# Altium PCB PCB.pcbdoc
Units mil, origin at the board's own origin, x right, y up, seen from the top; angles counter-clockwise.
Board outline 3675 x 3422.74 mil, 2 copper layers (Top Layer, Bottom Layer); 32 components, 82 nets, 167 pads, 7 vias.
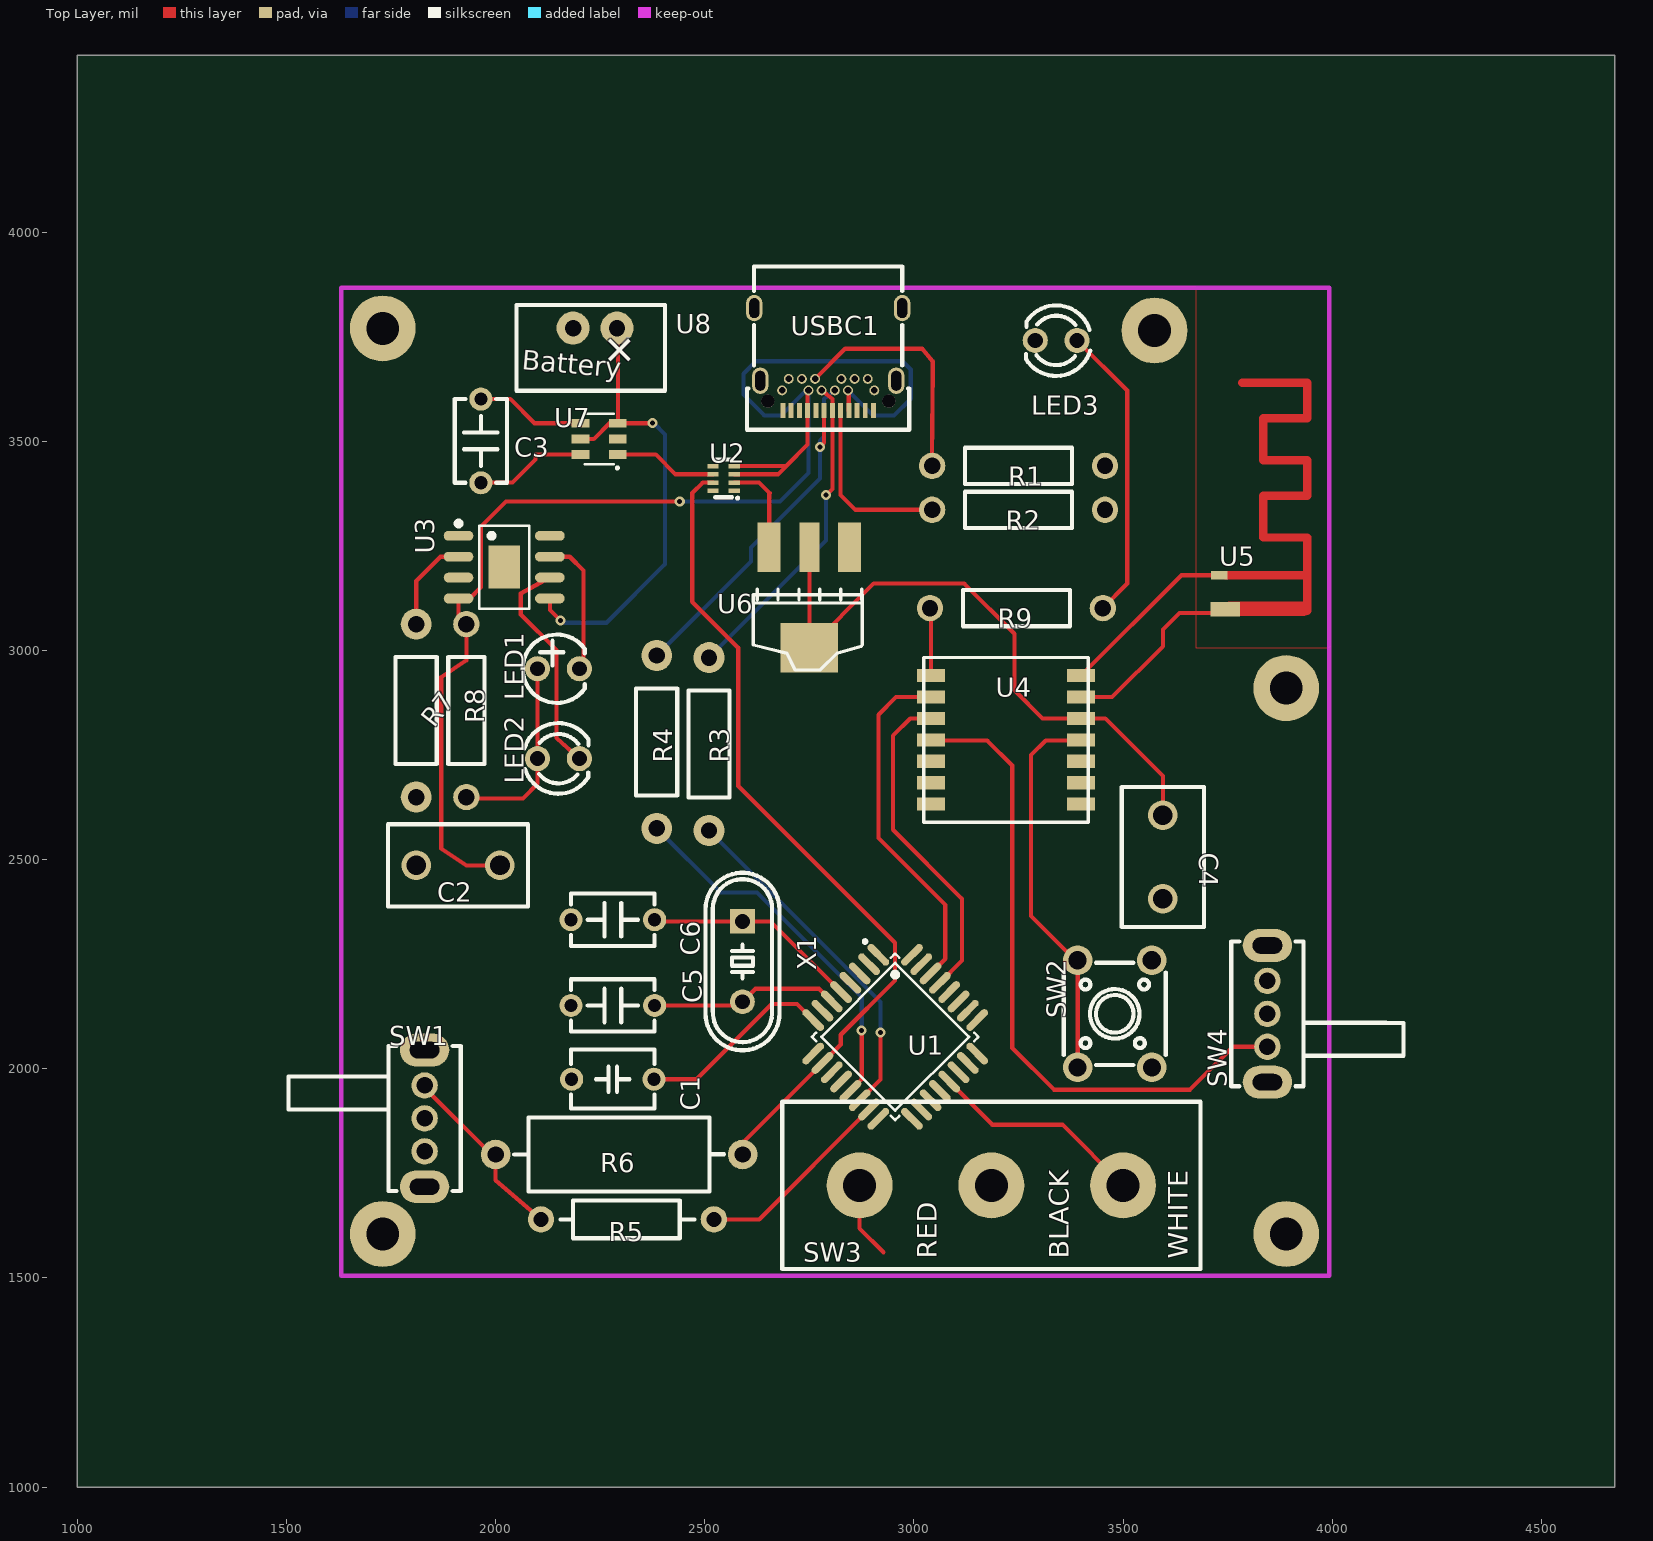
[diagram p0: Top Layer view]
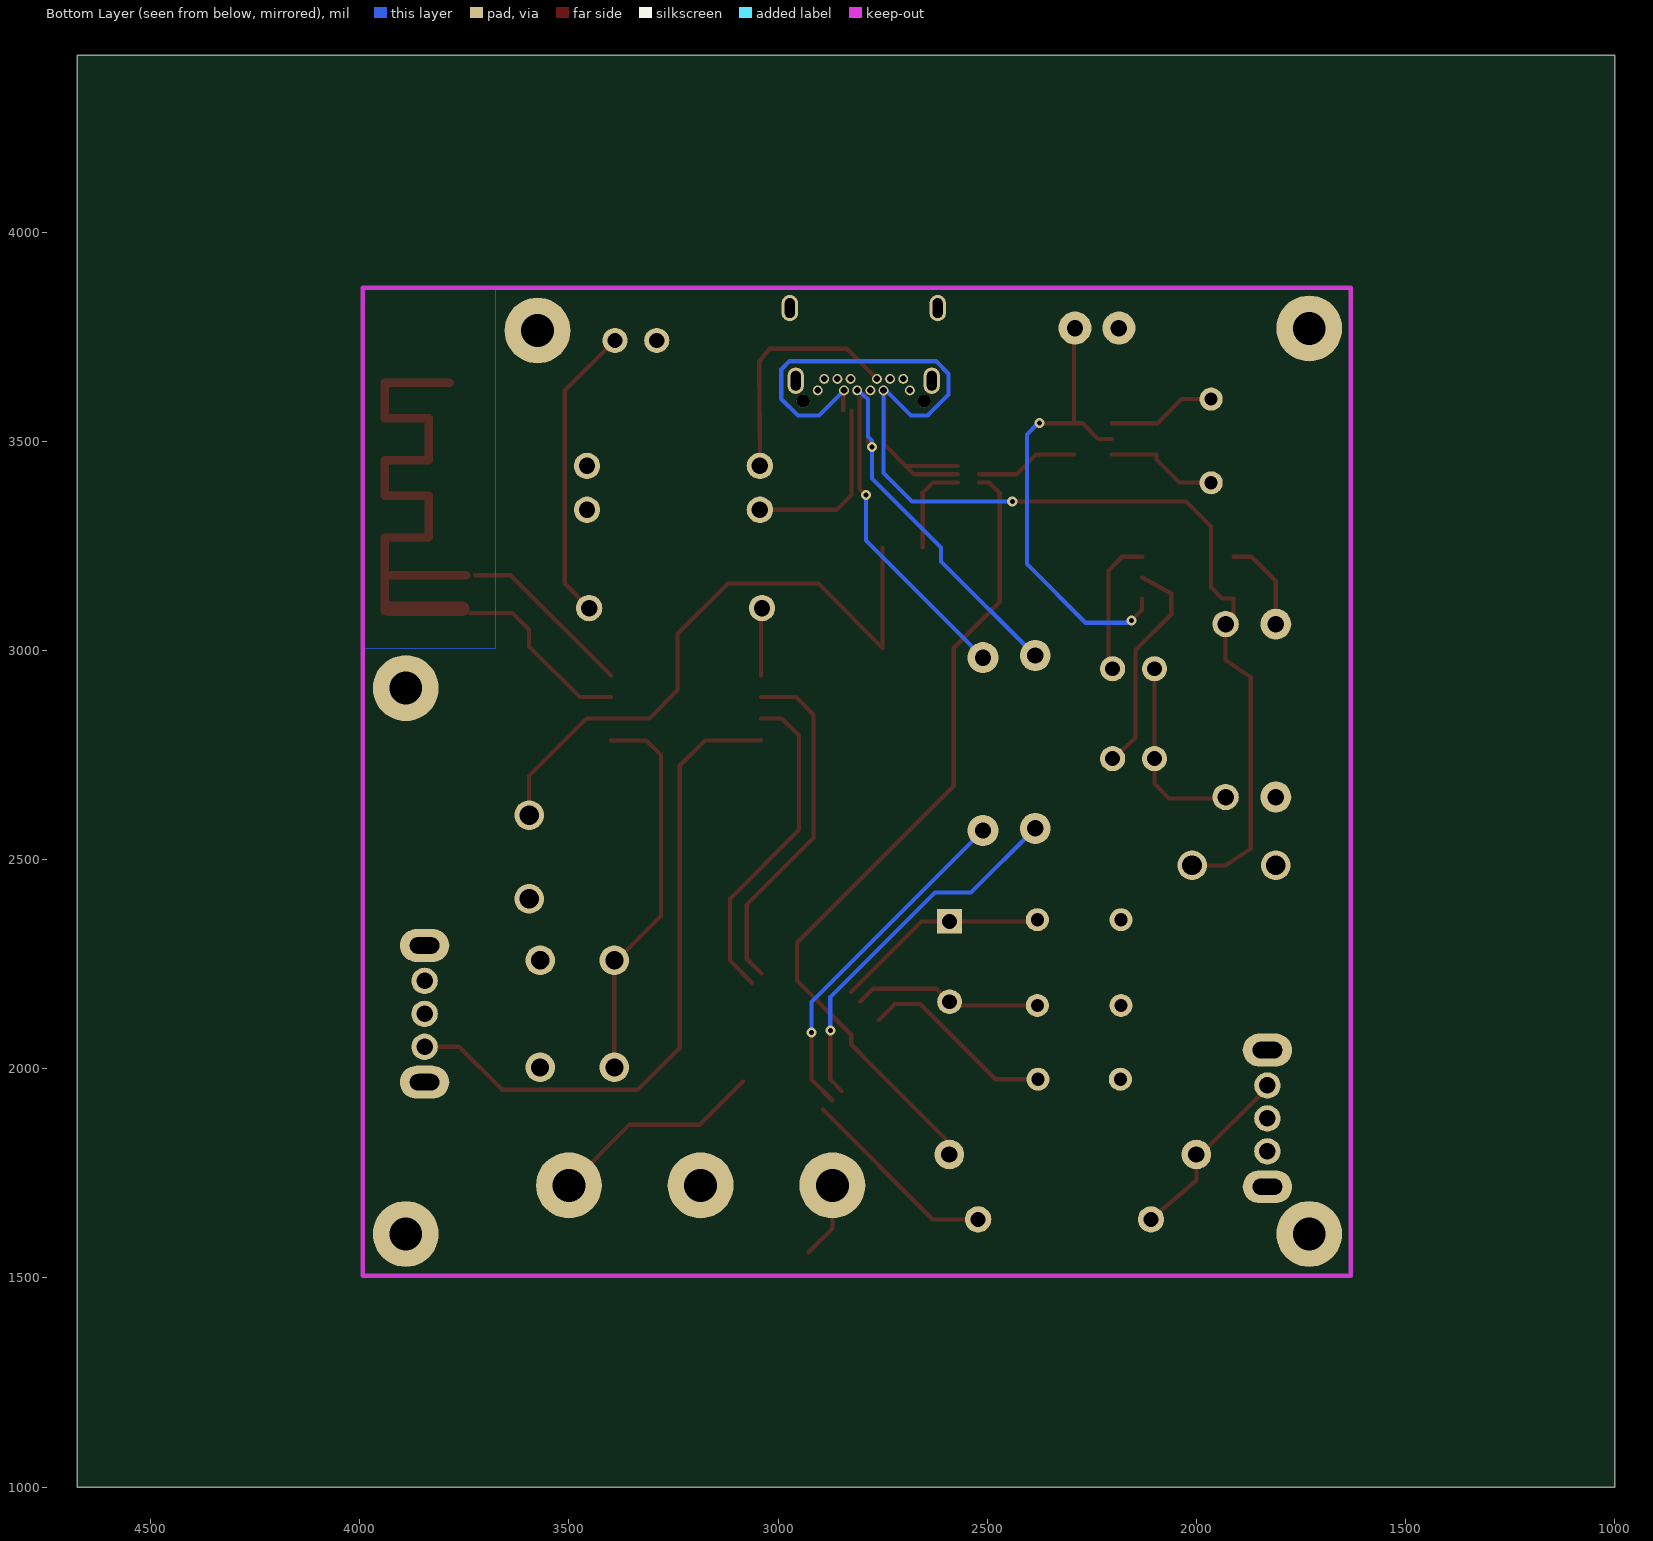
[diagram p1: Bottom Layer view, seen from below]

## Layer stack, top to bottom
Top Layer: signal copper (thickness not stored)
Dielectric: dielectric 12.6, FR-4, Dk 4.8
Bottom Layer: signal copper (thickness not stored)

## Board outline
4675,1000 1000,1000 1000,4422.74 4675,4422.74

## Components (designator, comment, footprint, x,y, rotation, side; value= is the part's Value field where it differs from the comment)
C1 "FG26X7R1H475KRT06" CAP-TH_L5.5-W3.5-P5.00-D0.5 2280,1975.05 r180 top
C2 "1uF" CAP-TH_L8.5-W5.0-P5.00-D1.2 1910,2486.4 r0 top
C3 "2.2uF" CAP-TH_L5.0-W2.5-P5.08-D0.7 1964.56,3501 r270 top
C4 "1uF" CAP-TH_L8.5-W5.0-P5.00-D1.2 3595,2506.4 r270 top
C5 "30pF" CAP-TH_L5.0-W2.5-P5.08-D0.7 2280,2151.4 r0 top
C6 "30pF" CAP-TH_L5.0-W2.5-P5.08-D0.7 2280,2356.4 r180 top
LED1 "204-10SDRD/S530-A3-L" LED-TH_BD3.8-P2.54-FD 2150,2956.4 r0 top
LED2 "204-10SUGD/S400-A5" LED-TH_BD3.0-P2.54-FD 2150,2741.4 r0 top
LED3 "204-10ASUBW/S400-A5" LED-TH_BD3.0-P2.54-FD 3340,3741.4 r180 top
R1 "5.1kΩ" RES-TH_BD2.2-L6.5-P10.50-D0.9 3250,3441.4 r180 top
R2 "5.1kΩ" RES-TH_BD2.2-L6.5-P10.50-D0.9 3250,3336.4 r0 top
R3 "1K" RES-TH_BD2.5-L6.5-P10.50-D0.6 2510,2776.4 r270 top
R4 "1K" RES-TH_BD2.5-L6.5-P10.50-D0.6 2385,2781.4 r270 top
R5 "300Ω" RES-TH_BD2.2-L6.5-P10.50-D0.6 2315,1640.05 r180 top
R6 "10kΩ" RES-TH_BD4.5-L11.0-P15.00-D0.7 2295,1795.05 r0 top
R7 "1K" RES-TH_BD2.5-L6.5-P10.50-D0.6 1810,2856.4 r90 top
R8 "3kΩ" RES-TH_BD2.2-L6.5-P10.50-D0.9 1930,2856.4 r270 top
R9 "3kΩ" RES-TH_BD2.2-L6.5-P10.50-D0.9 3245,3101.4 r180 top
SW1 "SK12D07VG6" SW-TH_SK12D07VG6 1830,1881.4 r270 top
SW2 "SKQJABA010" KEY-TH_4P-L6.2-W6.2-P4.50-LS6.5 3480,2131.4 r90 top
SW3 "TFS-201" TFS-201 3185,1721.4 r0 top
SW4 "SK12D07VG6" SW-TH_SK12D07VG6 3845,2131.4 r90 top
U1 "STC32G12K128-BETA-LQFP32" LQFP-32_L7.0-W7.0-P0.80-LS9.0-BL 2955,2076.4 r225 top
U2 "TPS2116DRLR" SOT-583-8_L2.1-W1.6-P0.50-LS1.6-BL 2545,3411.4 r90 top
U3 "PW4056" ESOP-8_L4.9-W3.9-P1.27-LS6.0-BL-EP2.6 2020.3,3199.29 r270 top
U4 "ECB02S2EE" ECB02S2 3220,2786.4 r0 top
U5 "天线EE" 蓝牙天线 3710,3345.05 r270 top
U6 "AMS1117-3.3EE" ? 2850,3246.4 r180 top
U7 "PW5410AEE" PW5410A 2247.34,3506 r90 top
U8 "锂电池接口" 电池接口 2190,3776 r270 top
USBC1 "TYPE-C-31-M-04" USB-C-SMD_TYPE-C-USB-20 2795,3696.4 r180 top
X1 "12MHz" HC-49US_L11.5-W4.5-P4.88 2590,2256.4 r270 top

## Footprints (in the part's own frame and the unit in brackets; to place one, negate y for a bottom-side part, rotate by r counter-clockwise, add the part's x,y. Pads: shape width x height; smd on the part's side, far side on the other; paste and mask are expansions set on the pad)
CAP-TH_L5.0-W2.5-P5.08-D0.7 [mm]
  round 1.4 hole 0.8: 1(-2.54,0) 2(2.54,0)
  silkscreen extent -2.54,-1.59 2.54,1.59
CAP-TH_L5.5-W3.5-P5.00-D0.5 [mm]
  round 1.4 hole 0.8: 1(-2.5,0) 2(2.5,0)
  silkscreen extent -2.54,-1.81 2.54,1.78
CAP-TH_L8.5-W5.0-P5.00-D1.2 [mm]
  round 1.8 hole 1.2: 1(-2.54,0) 2(2.54,0)
  silkscreen extent -4.25,-2.5 4.25,2.5
ECB02S2 [mm]
  rect 1.7x0.8 smd: 1(-4.55,3.9) 2(-4.55,2.6) 3(-4.55,1.3) 4(-4.55,0) 5(-4.55,-1.3) 6(-4.55,-2.6) 7(-4.55,-3.9) 8(4.55,-3.9) 9(4.55,-2.6) 10(4.55,-1.3) 11(4.55,0) 12(4.55,1.3) 13(4.55,2.6) 14(4.55,3.9)
  silkscreen extent -5,-5 5,5
ESOP-8_L4.9-W3.9-P1.27-LS6.0-BL-EP2.6 [mm]
  oval 0.6x1.8 smd: 1(-1.905,-2.773) 2(-0.635,-2.773) 3(0.635,-2.773) 4(1.905,-2.773) 5(1.905,2.773) 6(0.635,2.773) 7(-0.635,2.773) 8(-1.905,2.773)
  rect 2.6x1.9 smd: 9(0,0)
  silkscreen extent -2.8,-2.92 2.53,1.52
HC-49US_L11.5-W4.5-P4.88 [mm]
  rect 1.5x1.5 hole 0.9: 1(-2.44,0)
  round 1.5 hole 0.9: 2(2.44,0)
  silkscreen extent -5.39,-2.25 5.39,2.25
KEY-TH_4P-L6.2-W6.2-P4.50-LS6.5 [mm]
  round 1.8 hole 1.1: 1(-3.251,2.25) 2(3.251,2.25) 3(-3.251,-2.251) 4(3.251,-2.25)
  silkscreen extent -3.1,-3.1 3.1,3.1
LED-TH_BD3.0-P2.54-FD [mil]
  round 60 hole 36: 1(-50,0) 2(50,0)
  silkscreen extent -81,-84 72,85
LED-TH_BD3.8-P2.54-FD [mil]
  round 60 hole 35.43: 1(-50,0) 2(50,0)
  silkscreen extent -85,-82 63,82
LQFP-32_L7.0-W7.0-P0.80-LS9.0-BL [mm]
  oval 0.448x1.684 smd: 1(-2.8,-4.242) 2(-2,-4.242) 3(-1.2,-4.242) 4(-0.4,-4.242) 5(0.4,-4.242) 6(1.2,-4.242) 7(2,-4.242) 8(2.8,-4.242) 17(2.8,4.242) 18(2,4.242) 19(1.2,4.242) 20(0.4,4.242) 21(-0.4,4.242) 22(-1.2,4.242) 23(-2,4.242) 24(-2.8,4.242)
  oval 1.684x0.448 smd: 9(4.242,-2.8) 10(4.242,-2) 11(4.242,-1.2) 12(4.242,-0.4) 13(4.242,0.4) 14(4.242,1.2) 15(4.242,2) 16(4.242,2.8) 25(-4.242,2.8) 26(-4.242,2) 27(-4.242,1.2) 28(-4.242,0.4) 29(-4.242,-0.4) 30(-4.242,-1.2) 31(-4.242,-2) 32(-4.242,-2.8)
  silkscreen extent -3.58,-5.48 3.58,3.58
PW5410A [mm]
  rect 0.532x1.07 smd: 1(-0.95,-1.135) 2(0,-1.135) 3(0.95,-1.135) 4(0.95,1.135) 5(0,1.135) 6(-0.95,1.135)
  silkscreen extent -1.84,-1.18 1.54,0.88
RES-TH_BD2.2-L6.5-P10.50-D0.6 [mm]
  round 1.6 hole 0.914: 1(-5.25,0) 2(5.25,0)
  silkscreen extent -4.06,-1.14 4.06,1.14
RES-TH_BD2.2-L6.5-P10.50-D0.9 [mm]
  round 1.6 hole 1: 1(-5.25,0) 2(5.25,0)
  silkscreen extent -3.25,-1.1 3.25,1.1
RES-TH_BD2.5-L6.5-P10.50-D0.6 [mil]
  round 74 hole 39.37: 1(-206.69,0) 2(206.69,0)
  silkscreen extent -128,-49 128,49
RES-TH_BD4.5-L11.0-P15.00-D0.7 [mm]
  round 1.8 hole 1: 1(-7.5,0) 2(7.5,0)
  silkscreen extent -6.37,-2.26 6.37,2.24
SOT-583-8_L2.1-W1.6-P0.50-LS1.6-BL [mm]
  rect 0.28x0.68 smd: 1(-0.75,-0.64) 2(-0.25,-0.64) 3(0.25,-0.64) 4(0.75,-0.64) 5(0.75,0.64) 6(0.25,0.64) 7(-0.25,0.64) 8(-0.75,0.64)
  silkscreen extent -1.27,-0.93 1.14,0.51
SW-TH_SK12D07VG6 [mm]
  round 1.6 hole 1: 1(-2,0) 2(0,0) 3(2,0)
  oval 2x3 hole 1 slot 1.8 at 90 deg: 4(4.15,0) 5(-4.15,0)
  silkscreen extent -4.4,-8.25 4.4,2.2
TFS-201 [mm]
  round 4 hole 2: 1_BLACK(0,0) 2_WHITE(8,0) 3_RED(-8,0)
  silkscreen extent -12.7,-5.08 12.7,5.08
USB-C-SMD_TYPE-C-USB-20 [mm]
  oval 1x1.6 hole 0.6 slot 1.2 at 90 deg: 0(-4.49,-3.105) 0(4.49,-3.105)
  oval 1x1.6 hole 0.6 slot 1.199 at 90 deg: 0(-4.13,1.305) 0(4.13,1.305)
  rect 0.3x0.9 smd: A1(-2.75,3.105) A2(-2.25,3.105) A3(-1.75,3.105) A4(-1.25,3.105) A5(-0.75,3.105) A6(-0.25,3.105) A7(0.25,3.105) A8(0.75,3.105) A9(1.25,3.105) A10(1.75,3.105) A11(2.25,3.105) A12(2.75,3.105)
  round 0.6 hole 0.4: B1(2.8,1.895) B2(2.4,1.195) B3(1.6,1.195) B4(1.2,1.895) B5(0.8,1.195) B6(0.4,1.895) B7(-0.4,1.895) B8(-0.8,1.195) B9(-1.2,1.895) B10(-1.6,1.195) B11(-2.4,1.195) B12(-2.8,1.895)
  round 0.8 hole 0.8 unplated: ""(-3.675,2.545) ""(3.675,2.545)
  silkscreen extent -4.93,-5.62 4.92,4.28
电池接口 [mm]
  round 2 hole 1: 1(0.127,2.54) 2(0.127,-0.127)
  silkscreen extent -1.27,-3.56 3.94,5.46
蓝牙天线 [mil]
  rect 35x70 smd: 1(246.06,34.45)
  rect 20x40 smd: 2(165,19.62)
  Top Layer lines w20: 165,35 165,230 ; -295,75 -295,230 -210,230 -210,125 -110,125 -110,230 -25,230 -25,125 75,125 75,230 250,230
  Top Layer lines w35: 245,45 245,157.2 245,220
? [mm]
  rect 1.4x3 smd: 1(0.1,0) 3(4.98,0)
  rect 1.2x3 smd: 2(2.54,0)
  rect 3.5x3 smd: 2(2.54,6.096)
  silkscreen extent -0.66,2.54 5.94,7.44

## Free pads (board coordinates)
  round 157.48 hole 78.74: 16(1730,3770.05) 17(1730,1605.05) 18(3890,1605.05) 19(3890,2910.05) 20(3575,3765.05)

## Via types
v1: diameter 24, hole 12, Top Layer to Bottom Layer, tented both sides, 7 vias

## Nets (pads, with @x,y where several pads share a name; then routed paths per layer and width w, separated by ;. In a path a pad name is that pad's centre, name@x,y a point inside that pad or via, vN(x,y) a via of type N, cw(c..) or ccw(c..) an arc to the next point about the centre after c; other vN are vias at no path point)
+3.3V: C4.1 U4.12 U6.2 | length 1511.9
  Top Layer w10: U6.2@2750,3246.41 2750,3006.41 2903.64,3160.05 3120,3160.05 3240,3040.05 3240,2905.05 3307.47,2837.58 U4.12 3457.47,2837.58 3595,2700.05 C4.1
+5V: C2.2 R8.1 U2.3 U2.4 U3.4 USBC1.A4 USBC1.A9 USBC1.B4 USBC1.B9 | length 3481.1
  Top Layer w10: U3.4 1937.9,3124.3 1965,3151.4 1965,3296.4 2025,3356.4 2185,3356.4 v1(2440,3356.4) ; U3.4@1911.15,3124.29 1911.15,3081.94 R8.1 1930,2976.4 1870,2936.4 1870,2711.4 1870,2646.4 1870,2526.4 1930,2486.4 C2.2 ; U2.3 2674.84,3421.24 2699.03,3445.43 ; U2.4 2694.53,3440.93 2745.79,3492.19 USBC1.A9 2745.79,3619.84 USBC1.B4 ; USBC1.B9 2844.22,3619.82 USBC1.A4
  Bottom Layer w10: v1(2440,3356.4) 2680,3356.4 2747.75,3424.15 USBC1.B4 2742.24,3621.79 2682.24,3561.79 2642.24,3561.79 2592.24,3611.79 2592.24,3661.79 2622.24,3691.79 2972.24,3691.79 2992.24,3671.79 2992.24,3601.79 2952.24,3561.79 2902.24,3561.79 USBC1.B9
BATTERY: U3.5 U7.3 U7.5 U8.1 | length 1141
  Top Layer w10: U3.5@2129.45,3124.29 2129.45,3096.95 v1(2155,3071.4) ; U7.5 2234.6,3506 2272,3543.4 U7.3 ; U8.1 2292.03,3768.97 U7.3 ; v1(2375,3543.4) U7.3
  Bottom Layer w10: v1(2155,3071.4) 2160,3066.4 2265,3066.4 2405,3206.4 2405,3516.4 2378,3543.4 v1(2375,3543.4)
BVIN: U2.6 U7.1 | length 247.4
  Top Layer w10: U7.1 2382.8,3468.6 2430.16,3421.24 U2.6
CTL_SW: SW3.2_WHITE U1.21 | length 518.5
  Top Layer w10: U1.21 3187.27,1866.4 3354.96,1866.4 SW3.2_WHITE
D+: R3.1 USBC1.A6 USBC1.B6 | length 773.3
  Top Layer w10: USBC1.B6@2779.2,3621.8 2779.25,3621.8 2805,3601.4 USBC1.A6 2804.85,3386.25 v1(2790,3371.4)
  Bottom Layer w10: R3.1 2790,3263.09 v1(2790,3371.4)
D-: R4.1 USBC1.A7 USBC1.B7 | length 903.8
  Top Layer w10: v1(2775,3486.4) 2785.16,3496.56 USBC1.A7
  Bottom Layer w10: R4.1 2610,3213.09 2610,3246.4 2775,3411.4 v1(2775,3486.4) 2775,3501.4 2785,3511.4 2785,3601.4 USBC1.B7@2810.8,3621.8
GND: C1.2 C2.1 C4.2 C5.1 C6.2 LED3.2 pad.16 pad.17 pad.18 pad.19 pad.20 R1.1 R2.2 R7.1 SW1.2 SW2.3 SW2.4 SW3.3_RED SW4.2 U2.1 U3.3 U3.9 U4.7 U4.13 U5.1 U6.1 U7.2 U8.2 USBC1.0 USBC1.A1 USBC1.A12 USBC1.B1 USBC1.B12 | length 442.7
  Top Layer w10: U4.13 3473.71,2888.76 3595,3010.05 3595,3050.05 3635,3090.05 U5.1@3735,3090.05
LED1_1: LED1.1 LED2.1 R8.2 | length 460.9
  Top Layer w10: R8.2 1933.31,2646.4 2065,2646.4 2100,2681.4 2100,2746.4 LED1.1
LED3_1: LED3.1 R9.1 | length 713.8
  Top Layer w10: LED3.1 3510,3621.4 3510,3160 R9.1
R1_2: R1.2 USBC1.B5 | length 575.4
  Top Layer w10: USBC1.B5 2835.5,3721.4 3020,3721.4 3045,3691.4 R1.2
R2_1: R2.1 USBC1.A5 | length 435.8
  Top Layer w10: USBC1.A5 2824.53,3371.87 2860,3336.4 R2.1
R6_1: R5.2 R6.1 SW1.1 | length 440.1
  Top Layer w10: SW1.1 1830,1954.77 1999.72,1785.05 1999.72,1733.63 R5.2
RXD: U1.30 U4.2 | length 842.9
  Top Layer w10: U1.30 3075,2263.2 3075,2391.4 2915,2551.4 2915,2846.4 2957.4,2888.8 U4.2
S$164: 
SW1_3: SW1.3
SW1_4: SW1.4
SW1_5: SW1.5
SW2_3:  | length 183.7
  Top Layer w10: 2870.04,1721.4 2870.04,1618.6 2927.24,1561.4
SW3_1_BLACK: SW3.1_BLACK
SW4_3: SW4.3
SW4_4: SW4.4
SW4_5: SW4.5
TXD: U1.29 U4.3 | length 789
  Top Layer w10: U4.3 2991.18,2837.58 2950,2796.4 2950,2571.4 3115,2406.4 3115,2258.67 U1.29
U1_1: U1.1
U1_2: U1.2
U1_3: U1.3
U1_4: U1.4
U1_7: U1.7
U1_8: C1.1 U1.8 | length 471
  Top Layer w10: C1.1@2378.4,1975 2480,1975 2660,2155 2720,2155 U1.8
U1_9: U1.9
U1_11: U1.11
U1_12: U1.12
U1_13: R4.2 U1.13 | length 892.5
  Top Layer w10: U1.13 2875,1974.13 v1(2875,2091.4)
  Bottom Layer w10: R4.2 2538.31,2421.4 2625,2421.4 2875,2171.4 v1(2875,2091.4)
U1_14: R3.2 U1.14 | length 835.2
  Top Layer w10: U1.14 2920,1974.59 v1(2920,2086.4)
  Bottom Layer w10: R3.2 2920,2159.71 v1(2920,2086.4)
U1_16: U1.16
U1_17: U1.17
U1_18: U1.18
U1_19: U1.19
U1_20: U1.20
U1_22: U1.22
U1_23: U1.23
U1_24: U1.24
U1_25: U1.25
U1_26: U1.26
U1_27: U1.27
U1_28: U1.28
U1_31: U1.31
U1_32: U1.32
U2_2: U2.2 U6.3 | length 225.7
  Top Layer w10: U2.2 2629.84,3401.56 2655,3376.4 2653.94,3375.34 U6.3
U2_5: U2.5
U2_8: U2.8
U3_1: U3.1
U3_2: R7.2 U3.2 | length 228.4
  Top Layer w10: R7.2 1810,3166.4 1867.89,3224.29 U3.2@1911.15,3224.29
U3_6: LED2.2 U3.6 | length 533.8
  Top Layer w10: U3.6@2129.45,3174.29 2060,3136.4 2060,3086.4 2145,3001.4 2145,2790.9 LED2.2
U3_7: LED1.2 U3.7 | length 333.3
  Top Layer w10: U3.7@2129.45,3224.29 2177.11,3224.29 2210,3191.4 2210,2966.4 LED1.2
U3_8: U3.8
U4_1: R9.2 U4.1 | length 162.5
  Top Layer w10: R9.2 3040.86,3098.84 U4.1
U4_4: SW4.1 U4.4 | length 1588.5
  Top Layer w10: U4.4 3042.21,2785.05 3175,2785.05 3235,2725.05 3235,2050.05 3335,1950.05 3660,1950.05 3762.61,2052.66 SW4.1
U4_5: U4.5
U4_6: U4.6
U4_8: U4.8
U4_9: U4.9
U4_10: U4.10
U4_11: SW2.1 SW2.2 U4.11 | length 913.1
  Top Layer w10: SW2.2@3377.5,2267.5 3280,2365 3280,2750 3315,2785 3397.8,2785 U4.11 ; SW2.1 3391.4,2105.5 SW2.2
U4_14: U4.14 U5.2 | length 424.2
  Top Layer w10: U4.14 3639.25,3180.05 U5.2@3723.92,3180.05
U7_4: C3.1 U7.4 | length 262.1
  Top Layer w10: C3.1 2035,3601.4 2093,3543.4 U7.4
U7_6: C3.2 U7.6 | length 273.1
  Top Layer w10: C3.2 2040,3401.4 2095,3456.4 2095,3468.6 U7.6
USB-CTL: R5.1 U1.15 | length 479.7
  Top Layer w10: R5.1 2630.01,1640.05 U1.15
USBC1_A2: USBC1.A2
USBC1_A3: USBC1.A3
USBC1_A8: USBC1.A8
USBC1_A10: USBC1.A10
USBC1_A11: USBC1.A11
USBC1_B2: USBC1.B2
USBC1_B3: USBC1.B3
USBC1_B8: USBC1.B8
USBC1_B10: USBC1.B10
USBC1_B11: USBC1.B11
VCC: R6.2 U1.10 U2.7 | length 2003.6
  Top Layer w10: U2.7 2503.9,3401.6 2495.2,3401.6 2470,3376.4 2470,3116.4 2580,3006.4 2580,2676.4 2955,2301.4 2955,2211.4 2825,2081.4 2825,2057.8 U1.10 ; R6.2@2590.27,1785.05 2590.27,1823.02 U1.10
XTALI: C5.2 U1.6 X1.2 | length 452.6
  Top Layer w10: C5.2 2581.06,2151.4 X1.2 2621.06,2191.4 2773.19,2191.4 U1.6
XTALO: C6.1 U1.5 X1.1 | length 517.4
  Top Layer w10: C6.1 2383.94,2352.46 X1.1 2656.67,2352.46 U1.5
pads on no net: USBC1.

## Polygon pours and split planes (outlines as drawn)
GND on Bottom Layer (solid): 1630,3865.05 1630,1505.05 3995,1505.05 3990,1510.05 3990,3005.05 3675,3005.05 3675,3865.05 3670,3865.05
GND on Top Layer (solid): 1630,3870.05 1630,1505.05 3995,1505.05 3995,3010.05 3990,3005.05 3675,3005.05 3675,3870.05

## Silkscreen, mask and mechanical layers (free items; w line width, h text height)
Top Overlay:
  text "+" at 2353.28,3709.68 h80 r135

## Text inside footprints (layer, text, board x,y; h text height)
SW3: Top Overlay "BLACK" at 3385,1546.4 h80 r90; Top Overlay "RED" at 3070,1546.4 h80 r90; Top Overlay "WHITE" at 3670,1546.4 h80 r90
U8: Top Overlay "Battery" at 2060,3656.4 h80 r355